# EAGLE board T09_Signal Senders_Build (EAGLE 6.5.0)

Size 100 x 80 mm. Coordinates in mm from the lower left corner, seen from the top.
Outline: 0,0 100,0 100,80 0,80 0,0
Copper layers (1*16): Top 0.0356mm / dielectric 1.5011mm / Bottom 0.0356mm
Design rules "LaenPCBOrder": minimum track width 6mil, minimum drill 13mil, track to track 6mil, track to pad 6mil, pad to pad 6mil, via to via 6mil, smd to smd 6mil, copper to edge 15mil, drill to drill 6mil, minimum pad ring 7mil, minimum via ring 7mil, stop-mask expansion 3mil, vias tented up to drill 0mil, thermal gap 10mil

## Footprints (pad centres in the part's own frame; a part is rotated, then mirrored left to right if it is on the bottom)
C0805 = smd 1.3 x 1.5: 1 -0.95,0; 2 0.95,0
C025-025X050 = drill 0.813 octagon: 1 -1.27,0; 2 1.27,0
DO41-10 = drill 1.118: A 5.08,0; C -5.08,0
TO220V = drill 1.016 long: 1 -2.54,-2.54; 2 0,-2.54; 3 2.54,-2.54
DIL28-3 = drill 0.813 long: 1 -16.51,-3.81; 2 -13.97,-3.81; 3 -11.43,-3.81; 4 -8.89,-3.81; 5 -6.35,-3.81; 6 -3.81,-3.81; 7 -1.27,-3.81; 8 1.27,-3.81; 9 3.81,-3.81; 10 6.35,-3.81; 11 8.89,-3.81; 12 11.43,-3.81; 13 13.97,-3.81; 14 16.51,-3.81; 15 16.51,3.81; 16 13.97,3.81; 17 11.43,3.81; 18 8.89,3.81; 19 6.35,3.81; 20 3.81,3.81; 21 1.27,3.81; 22 -1.27,3.81; 23 -3.81,3.81; 24 -6.35,3.81; 25 -8.89,3.81; 26 -11.43,3.81; 27 -13.97,3.81; 28 -16.51,3.81
2X03 = drill 1.016 octagon: 1 -2.54,-1.27; 2 -2.54,1.27; 3 0,-1.27; 4 0,1.27; 5 2.54,-1.27; 6 2.54,1.27; 7 5.08,1.27; 8 5.08,-1.27
1X03 = drill 1.016 long: 1 -2.54,0; 2 0,0; 3 2.54,0
1X02/90 = drill 1.016 long: 1 -1.27,-3.81; 2 1.27,-3.81
LED3MM = drill 0.813 octagon: A -1.27,0; K 1.27,0
M0805 = smd 1.3 x 1.6: 1 -0.95,0; 2 0.95,0
TACTILE-PTH = drill 1.016 pad 1.88: 1 -3.251,2.261; 2 3.251,2.261; 3 -3.251,-2.261; 4 3.251,-2.261
TL3XYO = drill 1.1 pad 1.422 long: 1 -2.54,0; 2 0,0; 3 2.54,0 | drill 1.1 pad 1.676: M1 -5.08,0; M2 5.08,0
MA03-2 = drill 1.016: 1 -2.54,-1.27 | drill 1.016 octagon: 2 -2.54,1.27; 3 0,-1.27; 4 0,1.27; 5 2.54,-1.27; 6 2.54,1.27
EDG-02 = drill 0.813 long: 1 -1.27,-3.81; 2 1.27,-3.81; 3 1.27,3.81; 4 -1.27,3.81
3,2 = hole 3.2: 0,0
733980-62 = drill 1 pad 2.5 long: 1 0,8.57; 2 0,2.42; 3 5,5.57
HC49US = drill 0.7 pad 1.651: 1 -2.54,0; 2 2.54,0

## Placement (x,y rotation side)
C1  22pF  [C0805]  7.11,14.99 180 top
C2  22pF  [C0805]  7.37,21.59 180 top
C3  100nF  [C0805]  34.8,20.32 270 top
C4  100u  [C025-025X050]  34.04,63.5 0 top
C5  10u  [C025-025X050]  46.23,63.75 180 top
C6  22pF  [C0805]  82.55,8.64 0 top
C7  22pF  [C0805]  21.84,9.65 0 top
C8  10u  [C025-025X050]  60.45,62.74 180 top
D1  1N4004  [DO41-10]  18.03,64.52 180 top
IC1  7805TV  [TO220V]  44.96,76.96 0 top
IC2  ATMEGA328  [DIL28-3]  50.8,20.32 270 top
IC3  7805TV  [TO220V]  59.44,76.96 0 top
JP1  [2X03]  93.98,15.75 90 top
JP2  [1X03]  20.32,2.54 0 top
JP3  [1X02/90]  4.83,50.04 180 top
JP4  [1X02/90]  78.74,33.02 0 top
JP5  [1X02/90]  78.74,26.67 0 top
JP6  [1X02/90]  78.74,21.59 0 top
LED1  RED  [LED3MM]  80.52,49.28 0 top
LED2  GREEN  [LED3MM]  80.52,54.61 0 top
LED3  YELLOW  [LED3MM]  80.52,59.69 0 top
LED4  BLUE  [LED3MM]  80.52,65.28 0 top
LED5  RED  [LED3MM]  71.63,76.45 0 top
R1  1k  [M0805]  90.68,49.28 0 top
R2  1k  [M0805]  90.68,53.59 0 top
R3  1k  [M0805]  90.68,59.44 0 top
R4  1k  [M0805]  90.68,64.26 0 top
R5  1k  [M0805]  71.88,68.33 0 top
R6  1k  [M0805]  35.05,37.85 0 top
S1  [TACTILE-PTH]  33.53,48.01 0 top
S2  TL32YO  [TL3XYO]  26.67,74.68 0 top
SV1  [MA03-2]  95.25,40.64 270 top
SW1  [EDG-02]  68.58,34.54 89.9 top
U$1  [3,2]  5.84,75.18 0 top
U$2  [3,2]  94.74,74.93 0 top
U$3  [3,2]  93.98,5.59 0 top
U$4  [3,2]  5.08,4.57 0 top
X1  [733980-62]  0,64.52 270 top
Y2  16MHz  [HC49US]  22.1,19.81 90 top

## Library data of the parts
C1-C8 R1-R6 = rcl
D1 = diode
IC1 IC3 = linear
IC2 = atmel; OC_FARNELL: unknown; OC_NEWARK: unknown
JP1-JP6 = pinhead
LED1-LED5 = led
S1 = SparkFun-Electromechanical
S2 = switch
SV1 = con-lstb; OC_FARNELL: unknown; OC_NEWARK: unknown
SW1 = special
U$1-U$4 = holes
X1 = con-conrad
Y2 = SparkFun-FreqCtrl

## Nets
+3V3: C6.1 C8.1 IC3.3 JP1.2
+5V: C3.1 C5.1 C7.1 IC1.3 IC2.7 IC2.20 IC3.1 JP2.1 LED5.A R6.1 SV1.2
+9V: D1.A X1.1
GND: C1.2 C2.2 C3.2 C4.2 C5.2 C6.2 C7.2 C8.2 IC1.2 IC2.8 IC2.22 IC3.2 JP1.1 JP2.3 JP3.2 R1.2 R2.2 R3.2 R4.2 R5.2 S1.2 SV1.6 SW1.1 SW1.2 X1.2
LED0: IC2.23 LED1.A
LED1: IC2.24 LED2.A
LED2: IC2.25 LED3.A
LED3: IC2.26 LED4.A
N$1: IC2.1 R6.2 S1.4 SV1.5
N$2: C1.1 IC2.10 Y2.1
N$3: C2.1 IC2.9 Y2.2
N$4: IC2.13 JP2.2
N$5: LED1.K R1.1
N$6: LED2.K R2.1
N$7: LED3.K R3.1
N$8: LED4.K R4.1
N$9: IC2.27 SW1.3
N$10: IC2.28 SW1.4
N$11: IC2.4
N$12: IC2.5
N$13: JP3.1 X1.3
N$15: IC2.6
N$16: IC2.11
N$17: IC2.12
N$18: LED5.K R5.1
N$22: C4.1 IC1.1 S2.3
N$23: D1.C S2.2
RF_SPI0: IC2.14 IC2.16 JP1.3 JP1.4
RF_SPI1: IC2.15 JP1.8
RF_SPI2: JP1.5 JP4.2
RF_SPI3: IC2.17 JP1.6 JP6.1 JP6.2 SV1.4
RF_SPI4: IC2.18 JP1.7 JP5.1 JP5.2 SV1.1
RF_SPI5: IC2.19 JP4.1 SV1.3

## Tracks (layer width: path | path; a pad name or v marks a point on that pad's centre or on a via)
+3V3  (3 unrouted)
+5V  (10 unrouted)
+9V  (1 unrouted)
GND  (24 unrouted)
LED0  (1 unrouted)
LED1  (1 unrouted)
LED2  (1 unrouted)
LED3  (1 unrouted)
N$1  (3 unrouted)
N$2  (2 unrouted)
N$3  (2 unrouted)
N$4  (1 unrouted)
N$5  (1 unrouted)
N$6  (1 unrouted)
N$7  (1 unrouted)
N$8  (1 unrouted)
N$9  (1 unrouted)
N$10  (1 unrouted)
N$13  (1 unrouted)
N$18  (1 unrouted)
N$22  (2 unrouted)
N$23  (1 unrouted)
RF_SPI0  (3 unrouted)
RF_SPI1  (1 unrouted)
RF_SPI2  (1 unrouted)
RF_SPI3  (4 unrouted)
RF_SPI4  (4 unrouted)
RF_SPI5  (2 unrouted)